# Altium PCB 智能家居-开关-按键板(蓝色电容按键).PcbDoc
Units mm, origin at the board's own origin, x right, y up, seen from the top; angles counter-clockwise.
Board outline 55.01 x 17.7 mm, 2 copper layers (Top Layer, Bottom Layer); 7 components, 6 nets, 24 pads, 0 vias.
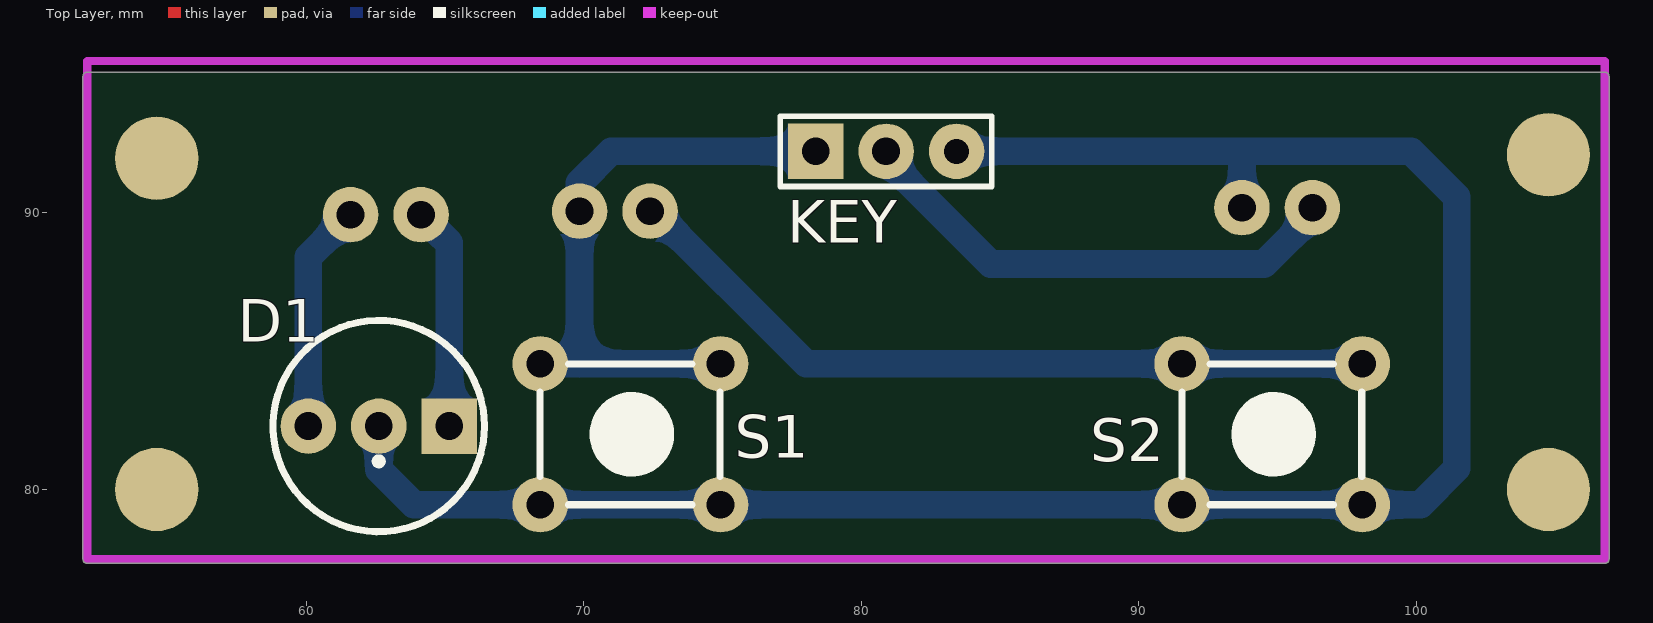
[diagram p0: Top Layer view]
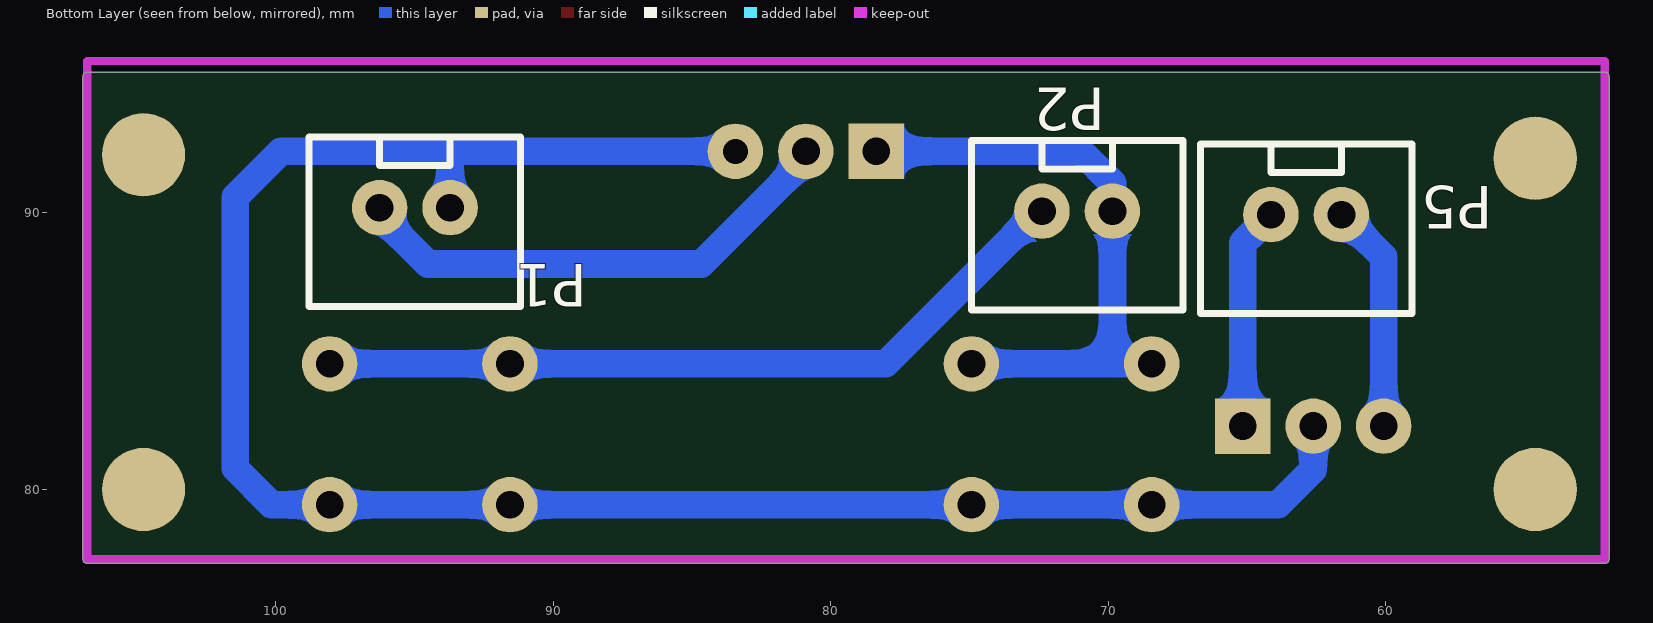
[diagram p1: Bottom Layer view, seen from below]

## Layer stack, top to bottom
Top Solder: solder mask 0.0102, Solder Resist, Dk 3.5
Top Layer: signal copper 0.0356
Dielectric 1: dielectric 0.32, FR-4, Dk 4.8
Bottom Layer: signal copper 0.0356
Bottom Solder: solder mask 0.0102, Solder Resist, Dk 3.5

## Board outline
52.1,77.35 cw(c52.1,77.5) 51.95,77.5 51.95,94.9 cw(c52.1,94.9) 52.1,95.05 106.807,95.05 cw(c106.807,94.9) 106.957,94.9 106.957,77.5 cw(c106.807,77.5) 106.807,77.35

## Design rules (kind name [scope] priority, off if disabled: settings)
Clearance [All] p1: gap=0.5
PolygonConnect [All] p1: connectstyle=Relief reliefconductorwidth=0.254 reliefentries=4 polygonreliefangle="90 Angle" airgapwidth=0.254
RoutingVias [All] p1: holewidth=1 width=2 viastyle="Through Hole" minholewidth=0.711 minwidth=1.27 maxholewidth=0.711 maxwidth=1.27
SolderMaskExpansion [All] p1: expansion=0.102
Width [All] p1: maxlimit=5 minlimit=0.5 preferedwidth=0.5 minimp=50.000000 maximp=50.000000 favimp=50.000000
30 further rules are at their usual default settings.

## Classes and differential pairs
component class 智能电灯-按键板: D1 P1 P2 P5 S1 S2

## Components (designator, comment, footprint, x,y, rotation, side; value= is the part's Value field where it differs from the comment)
D1 "RG-LED-K" RG-LED 65.151,82.296 r180 top
KEY "Comment" HDR1X3 78.359,92.202 r0 top
P1 "操作面板电源接口" DG1282 91.186,99.314 r0 bottom
P2 "按键控制接口" DG1282 67.31,99.187 r0 bottom
P5 "指示灯接口" DG1282 59.055,99.06 r0 bottom
S1 "SW-PB" KEY_M 68.432,84.541 r0 top
S2 "SW-PB" KEY_M 91.567,84.541 r0 top

## Footprints (in the part's own frame and the unit in brackets; to place one, negate y for a bottom-side part, rotate by r counter-clockwise, add the part's x,y. Pads: shape width x height; smd on the part's side, far side on the other; paste and mask are expansions set on the pad)
DG1282 [mm]
  round 2 hole 1: 1(2.54,9.144) 2(5.08,9.144)
  silkscreen extent 0,6.6 7.62,12.7
HDR1X3 [mm] "Connector; Header; 3 Position"
  rect 2x2 hole 1: 1(0,0)
  round 2 hole 1: 2(2.54,0)
  round 2 hole 0.9: 3(5.08,0)
  silkscreen extent -1.27,-1.27 6.35,1.27
KEY_M [mm]
  round 2 hole 1: 1(0,0) 1(6.5,0) 2(0,-5.08) 2(6.5,-5.08)
  silkscreen extent 0,-5.08 6.48,0
RG-LED [mm]
  rect 2x2 hole 1: 1(0,0)
  round 2 hole 1: 2(2.54,0) 3(5.08,0)
  silkscreen extent -1.27,-3.81 6.35,3.81

## Part data
P1 P2 P5: library part "Header 2H", "Header, 2-Pin, Right Angle"
S1 S2: "Switch"

## Free pads (board coordinates)
  round 3 all layers, no hole: 2(54.61,80.01) 3(54.61,91.948) 4(104.775,80.01) 5(104.775,92.075)

## Nets (pads, with @x,y where several pads share a name; then routed paths per layer and width w, separated by ;. In a path a pad name is that pad's centre, name@x,y a point inside that pad or via, vN(x,y) a via of type N, cw(c..) or ccw(c..) an arc to the next point about the centre after c; other vN are vias at no path point)
GND: D1.2 KEY.3 P1.1 S1.2 S2.2 | length 72.1
  Bottom Layer w1: D1.2 62.611,80.731 63.881,79.461 68.432,79.461 74.932,79.461 91.567,79.461 98.067,79.461 100.162,79.461 101.473,80.772 101.473,90.551 99.822,92.202 93.599,92.202 ; KEY.3 93.599,92.202 ; P1.1 93.726,92.075 93.599,92.202
KEY1: KEY.1 P2.1 S1.1 | length 22
  Bottom Layer w1: S1.1@68.432,84.541 69.85,84.541 ; S1.1@74.932,84.541 69.85,84.541 ; KEY.1 70.993,92.202 69.85,91.059 P2.1 69.85,84.541
KEY2: P2.2 S2.1 | length 28
  Bottom Layer w1: P2.2@72.39,90.17 78.019,84.541 91.567,84.541 S2.1@98.067,84.541
LED1: D1.1 P5.2 | length 8
  Bottom Layer w1: P5.2 65.151,88.9 D1.1
LED2: D1.3 P5.1 | length 8.3
  Bottom Layer w1: D1.3 60.071,88.392 P5.1
VCC-3.3: KEY.2 P1.2 | length 18.2
  Bottom Layer w1: KEY.2 80.899,91.914 84.675,88.138 94.522,88.138 96.266,89.882 P1.2

## Keep-outs
Keep-Out Layer:
  lines w0.3: 52.1,77.5 52.1,95.456 106.807,95.456 106.807,77.5 52.1,77.5

## Silkscreen, mask and mechanical layers (free items; w line width, h text height)
Drill Drawing:
  text ".LEGEND" at 86.36,70.612 h1.52
  text "Drill Drawing." at 86.36,68.453 h1.52

## Dimensions
52.1,77.5 to 52.1,95.456 on Mechanical 1
52.1,77.5 to 106.807,77.5 on Mechanical 1